# Altium PCB Copy of Line_follower1_PCB.PcbDoc (part 2 of 2)
Units mil, origin at the board's own origin, x right, y up, seen from the top; angles counter-clockwise.
Board outline 6000 x 4000 mil, 2 copper layers (Top Layer, Bottom Layer); 67 components, 62 nets, 271 pads, 117 vias.
Unrouted connection lines stored in the file: 3.
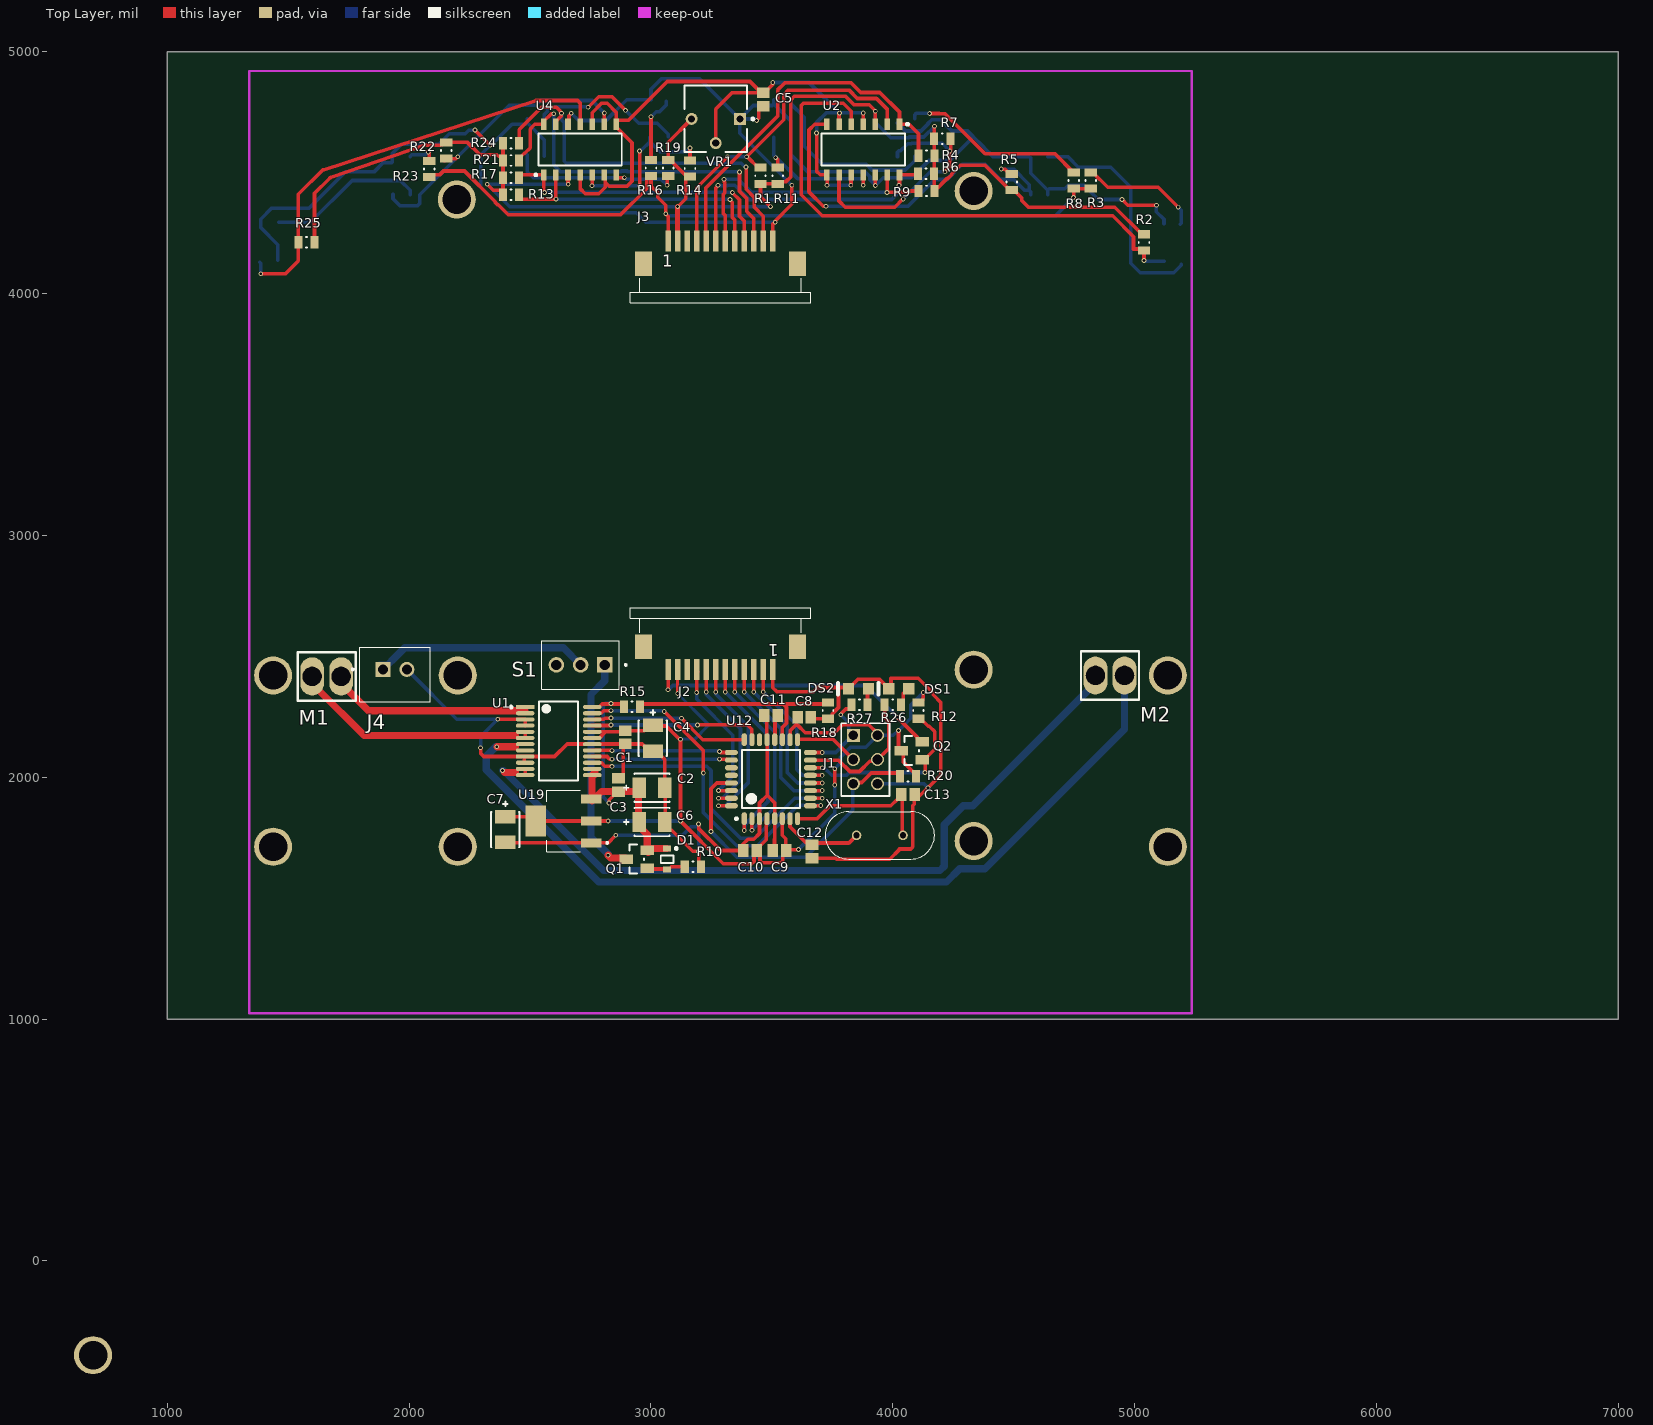
[diagram p0: Top Layer view]

## Keep-outs (continued)
Keep-Out Layer: (continued)
  lines w10: 1338.58,1023.62 5236.22,1023.62 ; 1338.58,1023.62 1338.58,4921.26 ; 1338.58,1023.62 1338.58,4921.26 ; 1338.58,1023.62 5236.22,1023.62 ; 1338.58,4921.26 5236.22,4921.26 ; 1338.58,4921.26 5236.22,4921.26 ; 5236.22,1023.62 5236.22,4921.26 ; 5236.22,1023.62 5236.22,4921.26

## Other copper
Multi-Layer:

## Silkscreen, mask and mechanical layers (free items; w line width, h text height)
Mechanical 1:
  lines w10: 1338.58,2480.32 1338.58,1653.54 1377.95,1614.17 1496.06,1614.17 1555.12,1673.23 1555.12,1791.34 1574.8,1811.02 2066.93,1811.02 2086.61,1791.34 2086.61,1673.23 2165.35,1594.49 2677.17,1594.49 2755.91,1515.75 4330.71,1515.75 ; 1338.58,4055.12 1338.58,4448.82 2834.65,4921.26 3740.16,4921.26 5236.22,4448.82 5236.22,4055.12 5039.37,4055.12 4763.78,4291.34 3690.94,4291.34 3690.94,4015.75 2883.86,4015.75 2883.86,4291.34 1811.02,4291.34 1535.43,4055.12 1338.58,4055.12

## Text inside footprints (layer, text, board x,y; h text height)
J2: Top Overlay "1" at 3527.93,2551.2 h50.08 r180; Mechanical 13 "1" at 3527.98,2551.2 h50.09 r180
J3: Top Overlay "1" at 3046.87,4112.19 h50.08; Mechanical 13 "1" at 3046.82,4112.18 h50.09